# Altium PCB PCB2.PcbDoc (part 1 of 2)
Units mm, origin at the board's own origin, x right, y up, seen from the top; angles counter-clockwise.
Board outline 247 x 102 mm, 2 copper layers (Top Layer, Bottom Layer); 194 components, 192 nets, 825 pads, 179 vias.
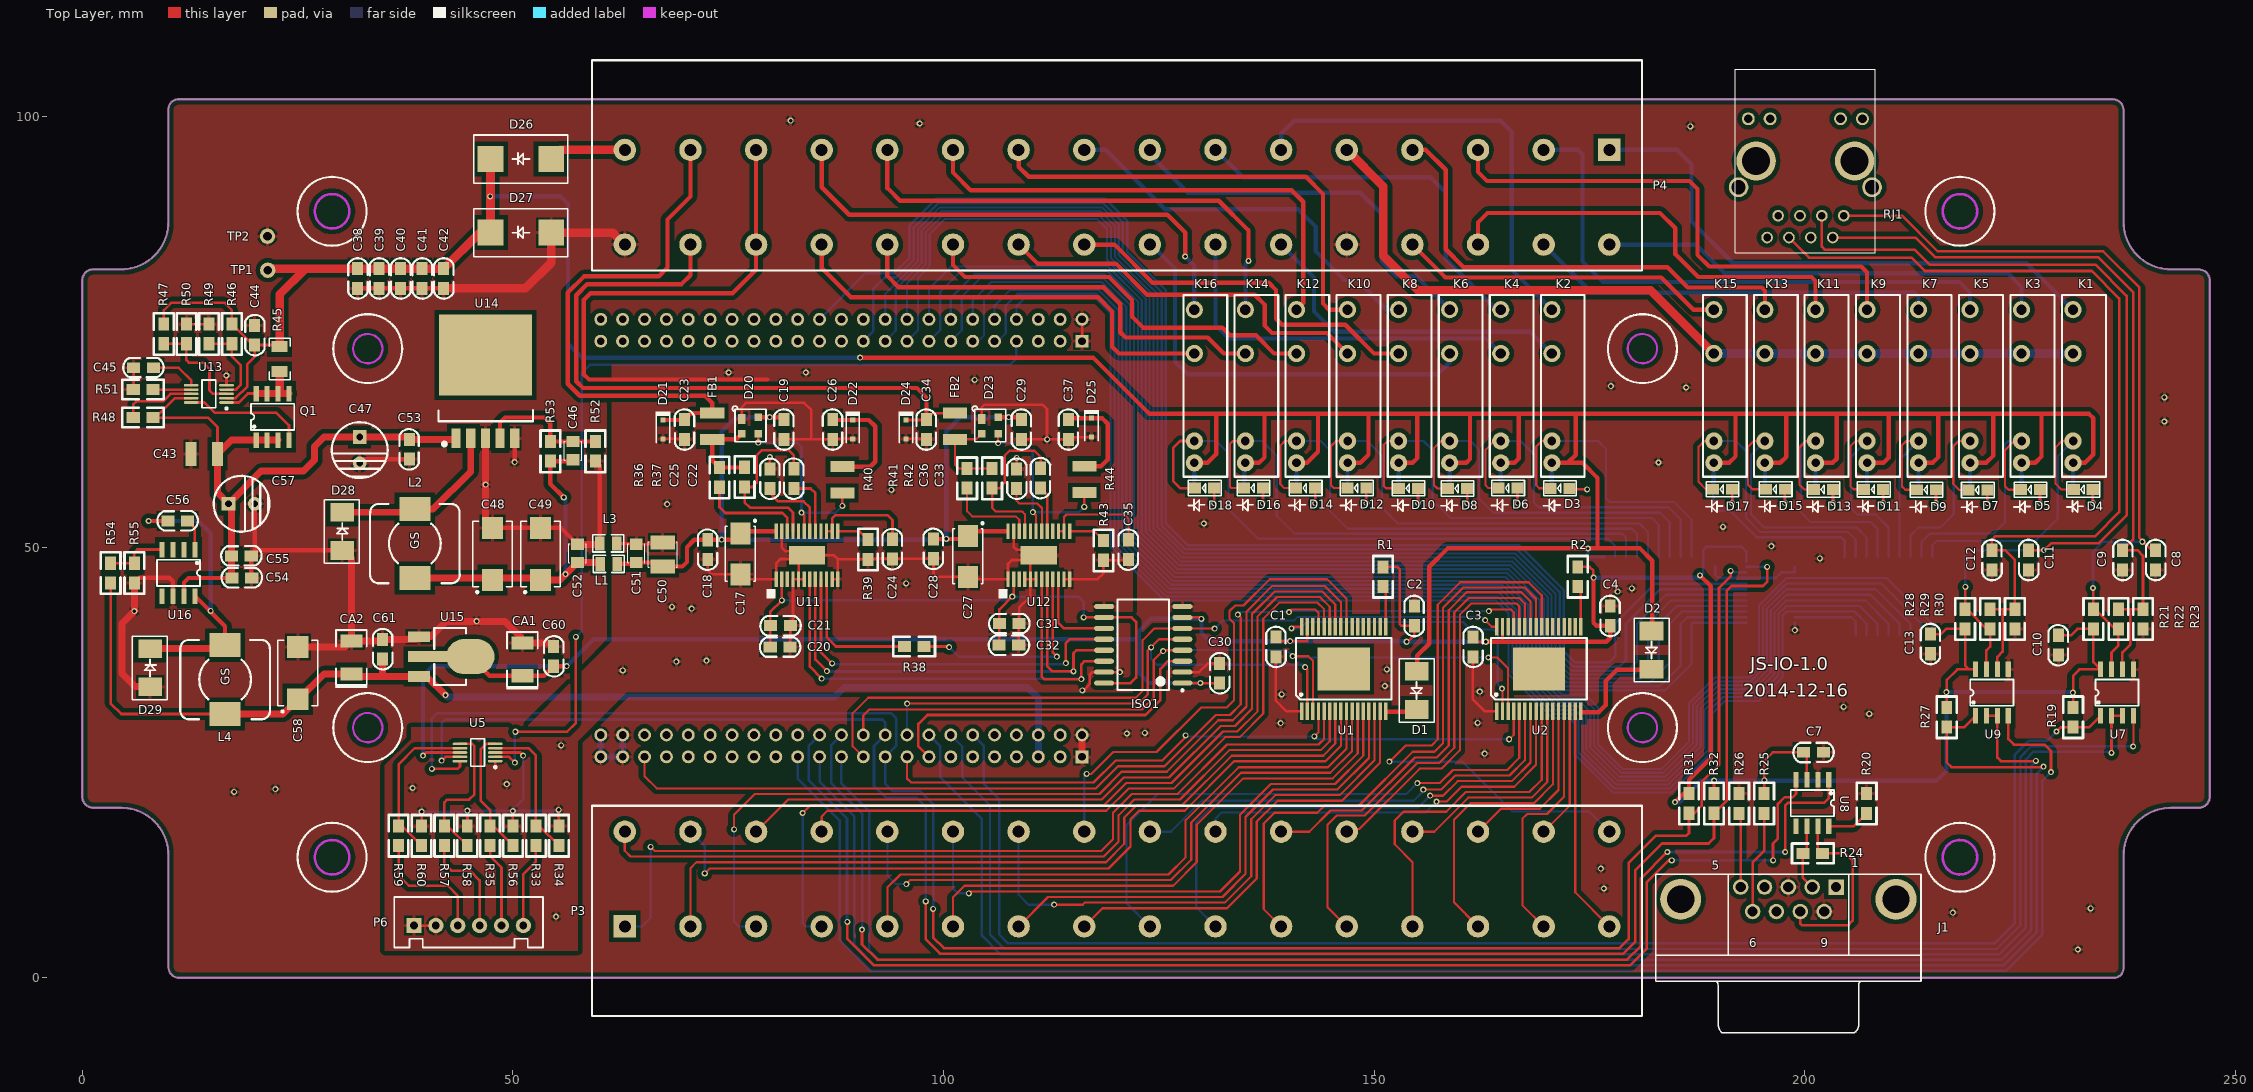
[diagram p0: Top Layer view]
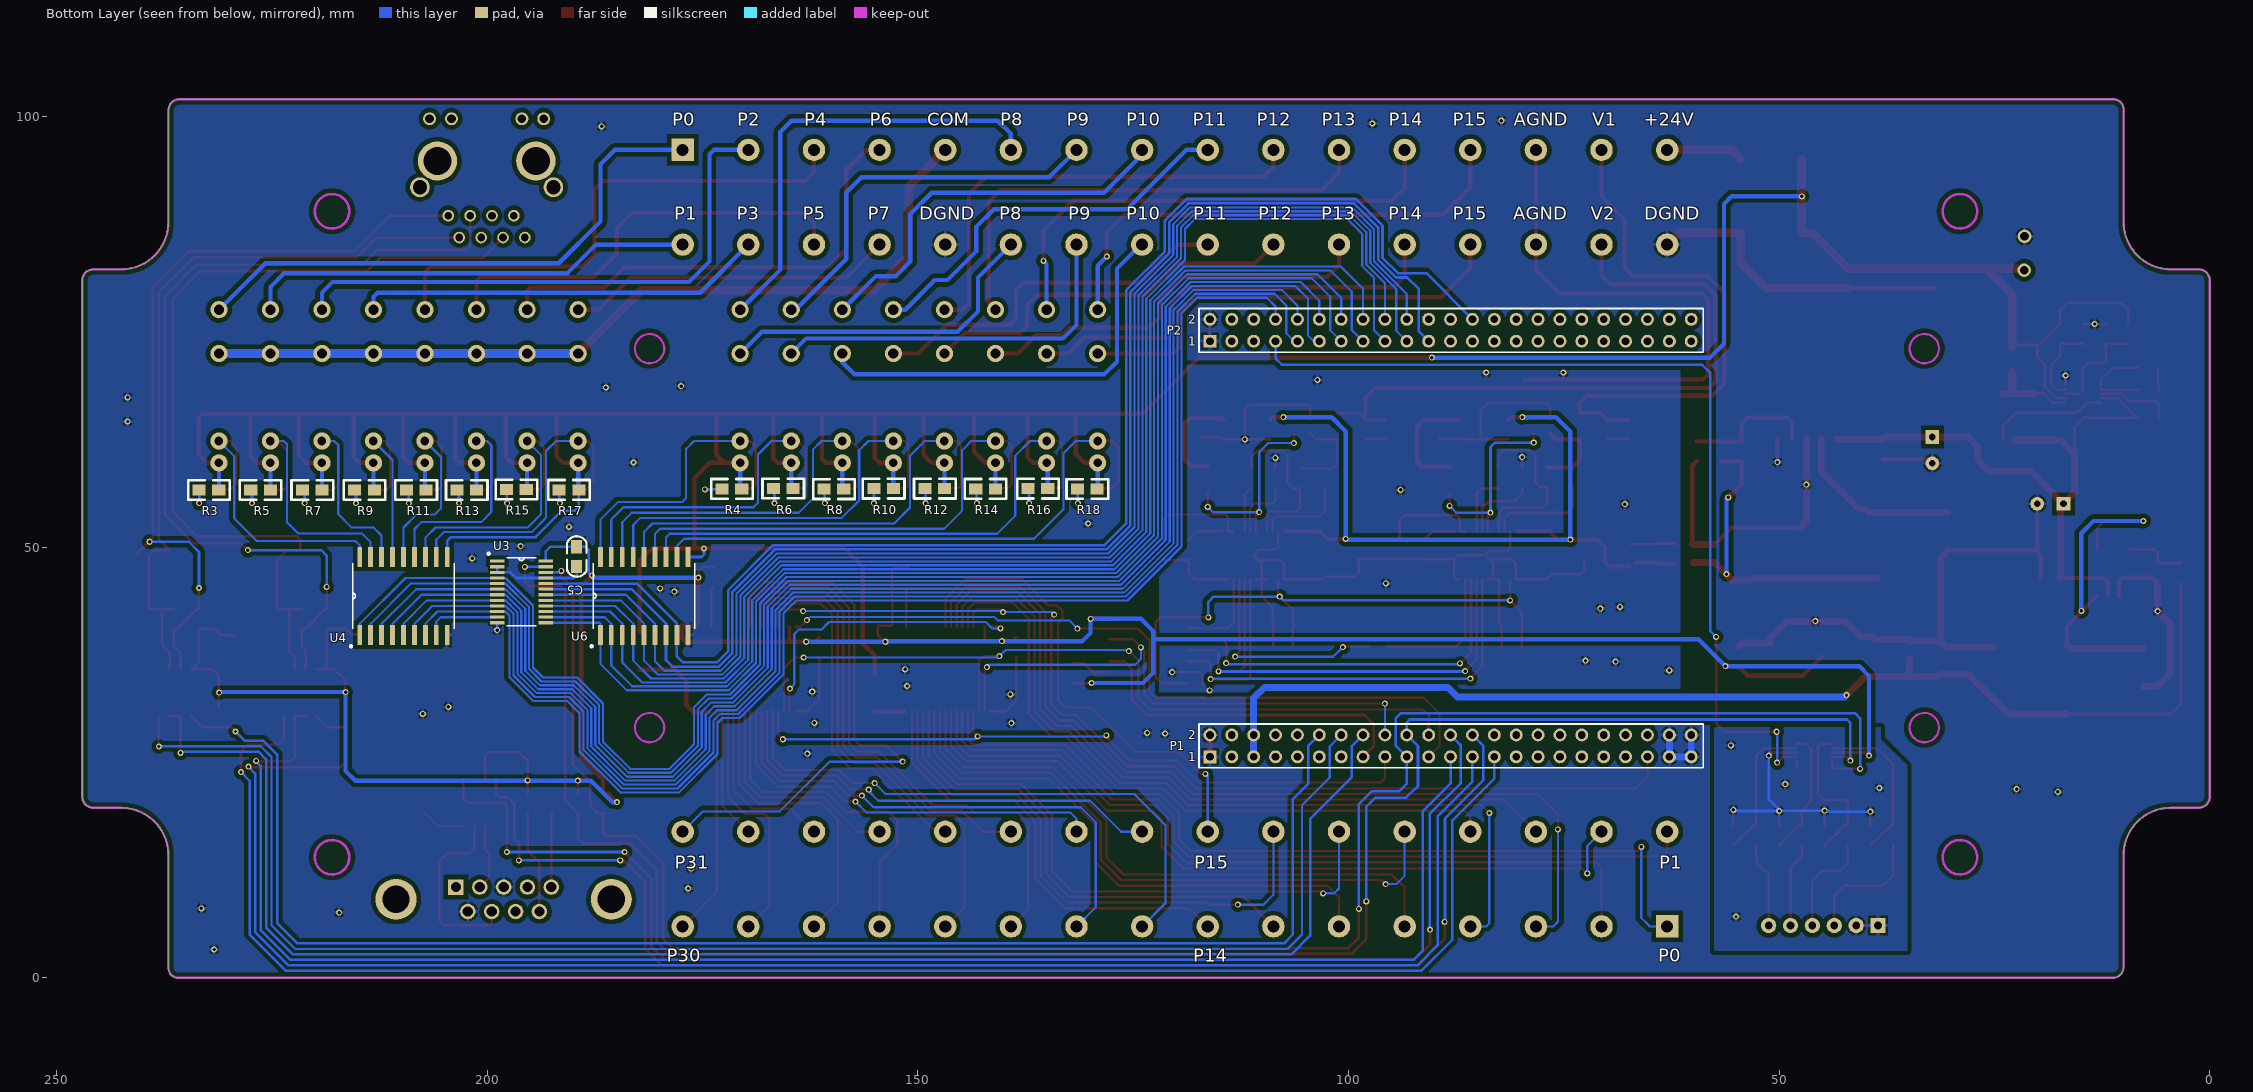
[diagram p1: Bottom Layer view, seen from below]

## Layer stack, top to bottom
Top Solder: solder mask 0.0102, Solder Resist, Dk 3.5
Top Layer: signal copper 0.0356
Dielectric1: dielectric 0.32, FR-4, Dk 4.8
Bottom Layer: signal copper 0.0356
Bottom Solder: solder mask 0.0102, Solder Resist, Dk 3.5

## Board outline
1.27,19.75 4.5,19.75 cw(c4.5,14.25) 10,14.25 10,1.27 ccw(c11.27,1.27) 11.27,0 235.857,0 ccw(c235.857,1.143) 237,1.143 237,14.243 cw(c242.5,14.243) 242.5,19.743 245.73,19.743 ccw(c245.73,21.013) 247,21.013 247,80.98 ccw(c245.73,80.98) 245.73,82.25 242.5,82.25 cw(c242.5,87.75) 237,87.75 237,100.73 ccw(c235.73,100.73) 235.73,102 11.143,102 ccw(c11.143,100.857) 10,100.857 10,87.757 cw(c4.5,87.757) 4.5,82.257 1.27,82.257 ccw(c1.27,80.987) 0,80.987 0,21.02 ccw(c1.27,21.02)

## Design rules (kind name [scope] priority, off if disabled: settings)
Clearance Clearance_1 [InPolygon] p1: gap=0.508
Clearance [All] p2: gap=0.2
ComponentClearance [All] p1: gap=0 collisioncheckmode=3 verticalgap=0 showdistances=FALSE
FabricationTestPointUsage TestPointUsage [All] p1: valid=0 allowmultiple=FALSE
FabricationTestpoint Testpoint [All] p1: side=3 testpointundercomponent=TRUE minsize=1.016 maxsize=2.54 preferedsize=1.524 minholesize=0 maxholesize=1.016 preferedholesize=0.813 testpointgrid=0.025 allowsidetop=TRUE allowsidebottom=TRUE usegrid=TRUE gridtolerance=0
Height [All] p1: minheight=0 maxheight=1873.374 prefheight=0
HoleSize [All] p1: absolutevalues=TRUE maxlimit=3.25 minlimit=0.025 maxpercent=80.000 minpercent=20.000
HoleToHoleClearance [All] p1: gap=0.2 allowstackedmicrovias=TRUE
MinimumSolderMaskSliver [All] p1: minsoldermaskwidth=0.2
PolygonConnect [All] p1: connectstyle=Relief reliefconductorwidth=0.4 reliefentries=4 polygonreliefangle="90 Angle" airgapwidth=0.254
RoutingVias [All] p1: holewidth=0.4 width=0.7 viastyle="Through Hole" minholewidth=0.15 minwidth=0.3 maxholewidth=0.711 maxwidth=1.27
SilkToSilkClearance [All] p1: silktosilkclearance=0.2
SilkToSolderMaskClearance [IsPad] p1: minsilkscreentomaskgap=0.2 clearancetoexposedcopper=TRUE
SolderMaskExpansion [All] p1: expansion=0.102
Width [All] p1: maxlimit=2 minlimit=0.254 preferedwidth=0.3 minimp=50.000000 maximp=50.000000 favimp=50.000000
20 further rules are at their usual default settings.

## Classes and differential pairs
net class PA[0..7]: PA0 PA1 PA2 PA3 PA4 PA5 PA6 PA7
net class PB[0..7]: PB0 PB1 PB2 PB3 PB4 PB5 PB6 PB7
component class Designator: C38 C39 C40 C41 C42 C43 C44 C45 C46 C47 C48 C49 C50 C51 C52 C53 C54 C55 C56 C57 C58 C60 C61 CA1 CA2 D26 D27 D28 D29 L1 L2 L3 L4 Q1 R45 R46 R47 R48 R49 R50 R51 R52 R53 R54 R55 TP1 TP2 U13 U14 U15 U16
component class Designator: P1 P2 P3 P4
component class Designator: C1 C2 C3 C4 D1 D2 R1 R2 U1 U2
component class Designator: C5 D3 D4 D5 D6 D7 D8 D9 D10 D11 D12 D13 D14 D15 D16 D17 D18 K1 K2 K3 K4 K5 K6 K7 K8 K9 K10 K11 K12 K13 K14 K15 K16 R3 R4 R5 R6 R7 R8 R9 R10 R11 R12 R13 R14 R15 R16 R17 R18 U3 U4 U6
component class Designator: C7 C8 C9 C10 C11 C12 C13 J1 P6 R19 R20 R21 R22 R23 R24 R25 R26 R27 R28 R29 R30 R31 R32 R33 R34 R35 R56 R57 R58 R59 R60 RJ1 U5 U7 U8 U9
component class Designator: C17 C18 C19 C20 C21 C22 C23 C24 C25 C26 C27 C28 C29 C30 C31 C32 C33 C34 C35 C36 C37 D20 D21 D22 D23 D24 D25 FB1 FB2 ISO1 R36 R37 R38 R39 R40 R41 R42 R43 R44 U11 U12

## Components (designator, comment, footprint, x,y, rotation, side; value= is the part's Value field where it differs from the comment)
C1 "Cap" 0805_cap 138.46,37.58 r90 top
C2 "0.1uF/10%/0805/50VDC" 0805_cap 154.76,42.85 r270 top
C3 "Cap" 0805_cap 161.34,37.58 r90 top
C4 "0.1uF/10%/0805/50VDC" 0805_cap 177.51,42.85 r270 top
C5 "Cap" 0805_cap 189.72,48.08 r90 bottom
C7 "" 0805_cap 200.163,26.3 r0 top
C8 "0.1uF/10%/0805/50VDC" 0805_cap 240.6,47.67 r90 top
C9 "0.1uF/10%/0805/50VDC" 0805_cap 236.78,47.67 r90 top
C10 "0.1uF/10%/0805/50VDC" 0805_cap 229.55,39.46 r270 top
C11 "0.1uF/10%/0805/50VDC" 0805_cap 225.85,47.67 r90 top
C12 "0.1uF/10%/0805/50VDC" 0805_cap 221.59,47.67 r90 top
C13 "0.1uF/10%/0805/50VDC" 0805_cap 214.7,39.6 r270 top
C17 "293D475X9035C2TE3" 6032-28 76.41,49.23 r270 top
C18 "GRM188R71H104KA93D" 0805_cap 72.73,50.55 r270 top
C19 "GRM188R71H104KA93D" 0805_cap 81.59,64.5 r270 top
C20 "GRM188R71H104KA93D" 0805_cap 80.18,38.53 r0 top
C21 "GRM188R71H104KA93D" 0805_cap 80.23,41.01 r0 top
C22 "GRM1885C1H222JA01D" 0805_cap 82.73,58.79 r270 top
C23 "06035C104KAT2A" 0805_cap 70.05,64.5 r270 top
C24 "06035C104KAT2A" 0805_cap 94.18,50.61 r270 top
C25 "C1608X7R1H223K" 0805_cap 79.71,57.11 r90 top
C26 "06035C104KAT2A" 0805_cap 87.24,64.5 r270 top
C27 "293D475X9035C2TE3" 6032-28 102.82,48.93 r270 top
C28 "GRM188R71H104KA93D" 0805_cap 98.94,50.64 r270 top
C29 "GRM188R71H104KA93D" 0805_cap 109.17,64.5 r270 top
C30 "GRM188R71H104KA93D" 0805_cap 131.93,34.53 r90 top
C31 "GRM188R71H104KA93D" 0805_cap 106.79,41.26 r0 top
C32 "GRM188R71H104KA93D" 0805_cap 106.75,38.74 r0 top
C33 "GRM1885C1H222JA01D" 0805_cap 111.38,58.86 r270 top
C34 "06035C104KAT2A" 0805_cap 98.12,64.5 r270 top
C35 "06035C104KAT2A" 0805_cap 121.57,50.55 r270 top
C36 "C1608X7R1H223K" 0805_cap 108.37,57.11 r90 top
C37 "06035C104KAT2A" 0805_cap 114.63,64.5 r270 top
C38 "Cap" 0805_cap 31.86,80.36 r90 top
C39 "Cap" 0805_cap 34.355,80.36 r90 top
C40 "Cap" 0805_cap 36.85,80.36 r90 top
C41 "Cap" 0805_cap 39.345,80.36 r90 top
C42 "Cap" 0805_cap 41.84,80.36 r90 top
C43 "GRM32ER72A225KA35L" 1210 14.17,60.83 r0 top
C44 "06031C102JAT2A" 0805_cap 19.9,73.78 r90 top
C45 "UMK107ABJ474KA-T" 0805_cap 7.94,70.72 r180 top
C46 "0.1uF/50V" C-0805 56.07,62.91 r270 top
C47 "220μF" CZ3.0/6.5 32.21,61.266 r90 top
C48 "476C" 7343-43 47.63,49.22 r90 top
C49 "476C" 7343-43 53.19,49.22 r90 top
C50 "10uF/10%/1210/16VDC" C-1210 65.69,51.35 r270 top
C51 "0.1uF/10%/0805/50VDC" C-0805 63.42,50.98 r270 top
C52 "0.1UF" C-0805 56.59,50.98 r270 top
C53 "0.1uF" 0805_CAP 38.08,62.196 r270 top
C54 "4.7μF/10%/0805" 0805_CAP 19.36,46.32 r180 top
C55 "4.7μF/10%/0805" 0805_CAP 19.31,48.86 r180 top
C56 "0.01μF/10%/0805" 0805_CAP 11.91,52.93 r180 top
C57 "220μF" CZ3.0/6.5 18.5,55.04 r180 top
C58 "476C" 7343-43 25.02,35.37 r90 top
C60 "0.1uF" 0805_CAP 54.61,36.49 r90 top
C61 "0.1uF" 0805_CAP 34.74,37.32 r90 top
CA1 "4.7UF/16V" 3528cap 51.12,35.1 r90 top
CA2 "10UF/16V" 3528cap 31.27,35.32 r90 top
D1 "SMB" SMB 154.92,33.37 r270 top
D2 "SMB" SMB 182.19,38.06 r270 top
D3 "LED3" 0805LED 171.53,56.85 r180 top
D4 "LED3" 0805LED 232.28,56.71 r180 top
D5 "LED3" 0805LED 226.15,56.69 r180 top
D6 "LED3" 0805LED 165.5,56.87 r180 top
D7 "LED3" 0805LED 220.05,56.66 r180 top
D8 "LED3" 0805LED 159.63,56.83 r180 top
D9 "LED3" 0805LED 214.08,56.68 r180 top
D10 "LED3" 0805LED 153.94,56.85 r180 top
D11 "LED3" 0805LED 207.95,56.73 r180 top
D12 "LED3" 0805LED 147.94,56.87 r180 top
D13 "LED3" 0805LED 202.12,56.71 r180 top
D14 "LED3" 0805LED 141.99,56.87 r180 top
D15 "LED3" 0805LED 196.56,56.74 r180 top
D16 "LED3" 0805LED 135.94,56.89 r180 top
D17 "LED3" 0805LED 190.4,56.74 r180 top
D18 "LED3" 0805LED 130.28,56.87 r180 top
D20 "" SOT-143 76.58,65.08 r0 top
D21 "CDSOD323-T15SC" sod-323 67.43,63.67 r270 top
D22 "CDSOD323-T15SC" sod-323 89.45,63.67 r270 top
D23 "" SOT-143 104.43,65.08 r0 top
D24 "" sod-323 95.65,63.67 r270 top
D25 "" sod-323 117.18,63.886 r270 top
D26 "B540C-13-F" SMB1 50.92,95.06 r180 top
D27 "SMCJ26CA" SMB1 50.92,86.52 r180 top
D28 "D Schottky" SMB 30.18,51.83 r90 top
D29 "SMB" SMB 7.87,35.99 r90 top
FB1 "MH3261-501Y" 1210 73.14,64.05 r270 top
FB2 "MH3261-501Y" 1210 101.32,64.05 r270 top
ISO1 "ISO7641FCDW" M16B_N 123.18,38.67 r180 top
J1 "" CONN_1734348-1 198.08,-0.38 r180 top locked
K1 "Relay-SPST" PA1a-24v 229.864,58.182 r90 top
K2 "Relay-SPST" PA1a-24v 169.349,58.182 r90 top
K3 "Relay-SPST" PA1a-24v 223.885,58.182 r90 top
K4 "Relay-SPST" PA1a-24v 163.42,58.182 r90 top
K5 "Relay-SPST" PA1a-24v 217.906,58.182 r90 top
K6 "Relay-SPST" PA1a-24v 157.49,58.182 r90 top
K7 "Relay-SPST" PA1a-24v 211.927,58.182 r90 top
K8 "Relay-SPST" PA1a-24v 151.561,58.182 r90 top
K9 "Relay-SPST" PA1a-24v 205.949,58.182 r90 top
K10 "Relay-SPST" PA1a-24v 145.631,58.182 r90 top
K11 "Relay-SPST" PA1a-24v 199.97,58.182 r90 top
K12 "Relay-SPST" PA1a-24v 139.702,58.182 r90 top
K13 "Relay-SPST" PA1a-24v 194.088,58.182 r90 top
K14 "Relay-SPST" PA1a-24v 133.772,58.182 r90 top
K15 "Relay-SPST" PA1a-24v 188.159,58.182 r90 top
K16 "Relay-SPST" PA1a-24v 127.843,58.182 r90 top
L1 "0R/5%/0805/1/8W" R-0805 59.61,47.16 r0 top
L2 "GSRH129-470M" GSDS104C2 38.61,50.42 r0 top
L3 "0R/5%/0805/1/8W" R-0805 59.57,49.53 r0 top
L4 "15μH" GSDS104C2 16.58,34.63 r0 top
P1 "Header 23X2" HDR2X23 116.078,25.658 r180 bottom locked
P2 "Header 23X2" HDR2X23 116.078,73.914 r180 bottom locked
P3 "Header 16X2" CON16X2-8.5 62.99,5.97 r90 top locked
P4 "Header 16X2" CON16X2-8.5 177.29,96.13 r270 top locked
P6 "ISP" SIP-6B 38.51,6.07 r0 top
Q1 "FDS8870" SO-G8 22.11,65.14 r0 top
R1 "10K/1%/0805/1/8W" 0805 151.02,47.71 r270 top
R2 "10K/1%/0805/1/8W" 0805 173.63,47.71 r270 top
R3 "Res3" 0805 231.16,56.64 r0 bottom
R4 "Res3" 0805 170.44,56.77 r0 bottom
R5 "Res3" 0805 225.15,56.64 r0 bottom
R6 "Res3" 0805 164.47,56.81 r0 bottom
R7 "Res3" 0805 219.15,56.64 r0 bottom
R8 "Res3" 0805 160.88,56.74 r180 bottom
R9 "Res3" 0805 213.09,56.64 r0 bottom
R10 "Res3" 0805 155.1,56.79 r180 bottom
R11 "Res3" 0805 207.09,56.64 r0 bottom
R12 "Res3" 0805 149.16,56.79 r180 bottom
R13 "Res3" 0805 201.22,56.64 r0 bottom
R14 "Res3" 0805 143.27,56.78 r180 bottom
R15 "Res3" 0805 195.45,56.7 r0 bottom
R16 "Res3" 0805 137.19,56.79 r180 bottom
R17 "Res3" 0805 189.35,56.65 r0 bottom
R18 "Res3" 0805 131.46,56.76 r180 bottom
R19 "10K/1%/0805/1/8W" 0805 231.14,29.11 r90 top
R20 "CRCW080560R4FKEA" 0805 207.17,19.1 r90 top
R21 "47K/5%/0805/1/8W" 0805 233.49,42.8 r270 top
R22 "12K/1%/0805/1/8W" 0805 236.4,42.8 r270 top
R23 "47K/5%/0805/1/8W" 0805 239.25,42.8 r270 top
R24 "CRCW080560R4FKEA" 0805 202.06,14.45 r180 top
R25 "CRCW080560R4FKEA" 0805 195.27,19.1 r90 top
R26 "CRCW080560R4FKEA" 0805 192.37,21.386 r270 top
R27 "10K/1%/0805/1/8W" 0805 216.47,29.11 r90 top
R28 "47K/5%/0805/1/8W" 0805 218.6,42.8 r270 top
R29 "12K/1%/0805/1/8W" 0805 221.5,42.8 r270 top
R30 "47K/5%/0805/1/8W" 0805 224.38,42.8 r270 top
R31 "CRCW080560R4FKEA" 0805 186.54,21.39 r270 top
R32 "CRCW080560R4FKEA" 0805 189.45,21.39 r270 top
R33 "CRCW080560R4FKEA" 0805 52.671,15.354 r90 top
R34 "CRCW080560R4FKEA" 0805 55.33,15.354 r90 top
R35 "CRCW080560R4FKEA" 0805 47.354,15.354 r90 top
R36 "CRCW060315R0JNEA" 0805 73.98,56.964 r90 top
R37 "CRCW060315R0JNEA" 0805 76.91,56.99 r90 top
R38 "Res3" 0805 97.73,38.47 r180 top
R39 "RT0603BRD0715KL" 0805 91.22,48.59 r90 top
R40 "RPC2512JT15R0" 1210 88.25,57.82 r270 top
R41 "CRCW060315R0JNEA" 0805 102.73,56.86 r90 top
R42 "CRCW060315R0JNEA" 0805 105.64,56.85 r90 top
R43 "RT0603BRD0715KL" 0805 118.56,48.481 r90 top
R44 "RPC2512JT15R0" 1210 116.34,57.87 r270 top
R45 "PRL1632-R020-F-T1" 1206 22.91,71.84 r270 top
R46 "CRCW060395K3FKEA" 0805 17.37,73.62 r90 top
R47 "CRCW060347K5FKEA" 0805 9.46,73.62 r90 top
R48 "CRCW060310K0FKEA" 0805 8.2,65.05 r180 top
R49 "CRCW06037K50FKEA" 0805 14.69,75.906 r270 top
R50 "CRCW060315K8FKEA" 0805 12.09,75.906 r270 top
R51 "RG1608P-563-B-T5" 0805 5.91,68.3 r0 top
R52 "1K/1%/0805" 0805 59.57,62.276 r270 top
R53 "4.7K/1%/0805" 0805 54.34,59.99 r90 top
R54 "10K" 0805 3.29,48.13 r270 top
R55 "3.24K/1%/0805" 0805 6.04,48.13 r270 top
R56 "CRCW080560R4FKEA" 0805 50.013,15.354 r90 top
R57 "CRCW080560R4FKEA" 0805 42.037,15.354 r90 top
R58 "CRCW080560R4FKEA" 0805 44.696,15.354 r90 top
R59 "CRCW080560R4FKEA" 0805 36.72,15.354 r90 top
R60 "CRCW080560R4FKEA" 0805 39.379,15.354 r90 top
RJ1 "HR911105A-RJ45" HR911105A 200.05,94.84 r0 top
TP1 "TP-040_RND" TP-040_RND 21.54,82.16 r0 top
TP2 "TP-040_RND" TP-040_RND 21.5,86.09 r0 top
U1 "MC33975" SOIC-32 151.33,30.96 r90 top
U2 "MC33975" SOIC-32 173.99,30.96 r90 top
U3 "PCA9555" PW24 196.01,44.8 r180 bottom
U4 "ULN2803A_DW_18" DW18 209.71,44.34 r90 bottom
U5 "ADS1015" MUB10A_N 45.9,26.16 r180 top
U6 "ULN2803A_DW_18" DW18 181.77,44.34 r90 bottom
U7 "MAX3485/SO-8" SO-G8 236.24,33.11 r0 top
U8 "SN65HVD230" SO-G8 200.86,20.29 r180 top
U9 "MAX3485/SO-8" SO-G8 221.72,33.11 r0 top
U11 "DAC8760IPWP" PWP24-DIE84X166 84.13,49.06 r90 top
U12 "DAC8760IPWP" PWP24-DIE84X166 111.05,49.06 r90 top
U13 "LM5069MM-2/NOPB" MUB10A_N 14.69,67.8 r180 top
U14 "LM2596S-ADJ" TO-263(S)-5 46.83,71.25 r0 top
U15 "AS1117-3.3V" SOT-223 45.03,37.3 r270 top
U16 "TPS5430" SO-G8 11.16,47.03 r180 top

## Footprints (in the part's own frame and the unit in brackets; to place one, negate y for a bottom-side part, rotate by r counter-clockwise, add the part's x,y. Pads: shape width x height; smd on the part's side, far side on the other; paste and mask are expansions set on the pad)
0805 [mil]
  rect 60x50 smd: 1(0,0) 2(90,0)
  silkscreen extent -50,-45 140,45
0805_cap [mm]
  rect 1.524x1.27 smd: 1(-0.31,-0.11) 2(1.976,-0.11)
  silkscreen extent -1.51,-1.26 3.19,0.99
0805_CAP [mm]
  rect 1.524x1.27 smd: 1(-0.31,-0.11) 2(1.976,-0.11)
  silkscreen extent -1.51,-1.26 3.19,0.99
0805LED [mm]
  rect 1.4x1.27 smd: 1(-1.143,0.013) 2(1.067,0.013)
  silkscreen extent -1.94,-0.88 1.88,2.67
1206 [mm] "1206 from SM-752 data"
  rect 1.3x1.85 smd: 1(-1.45,0) 2(1.45,0)
  silkscreen extent -2.4,-1.21 2.4,1.21, body extent -1.7,-0.9 1.7,0.9, height 1.35
1210 [mil]
  rect 50x110 smd mask+2: 1(60,0) 2(-60,0)
3528cap [mil]
  rect 60x100 smd: 1(-1,1) 2(149,1)
  silkscreen extent -61,-69 199,71
6032-28 [mm] "Medium Density IPC based on Vishay Sprague 293D datasheet."
  rect 2.55x2.3 smd: 1(-2.375,0) 2(2.375,0)
  silkscreen extent -3.96,-1.75 3.2,1.83, body extent -3.15,-1.75 3.15,1.75, height 2.8
7343-43 [mm] "Medium density IPC based on Kemet T495 series"
  rect 2.55x2.45 smd: 1(-3.025,0) 2(3.025,0)
  silkscreen extent -4.56,-2.3 3.8,2.3, body extent -3.8,-2.3 3.8,2.3, height 4.3
C-0805 [mm]
  rect 1.3x1.5 smd: 1(0.65,0.9) 2(2.75,0.9)
  silkscreen extent 0.6,-0.1 2.8,1.9
C-1210 [mm]
  rect 1.6x2.8 smd: 1(0.8,1.7) 2(3.6,1.7)
  silkscreen extent 0.7,0.03 3.7,3.37
CON16X2-8.5 [mm]
  rect 2.6x2.6 hole 1.4: 1(0,0)
  round 2.6 hole 1.4: 2(11,0) 3(0,-7.62) 4(11,-7.62) 5(0,-15.24) 6(11,-15.24) 7(0,-22.86) 8(11,-22.86) 9(0,-30.48) 10(11,-30.48) 11(0,-38.1) 12(11,-38.1) 13(0,-45.72) 14(11,-45.72) 15(0,-53.34) 16(11,-53.34) 17(0,-60.96) 18(11,-60.96) 19(0,-68.58) 20(11,-68.58) 21(0,-76.2) 22(11,-76.2) 23(0,-83.82) 24(11,-83.82) 25(0,-91.44) 26(11,-91.44) 27(0,-99.06) 28(11,-99.06) 29(0,-106.68) 30(11,-106.68) 31(0,-114.3) 32(11,-114.3)
  silkscreen extent -10.4,-118.11 14,3.81
CONN_1734348-1 [mm] "Connector; D Subminiature 9 Position; Right Angle"
  rect 1.8x1.8 hole 1.2: 1(-5.54,-10.92)
  round 1.8 hole 1.2: 2(-2.77,-10.92) 3(0,-10.92) 4(2.77,-10.92) 5(5.54,-10.92) 6(-4.155,-8.08) 7(-1.385,-8.08) 8(1.385,-8.08) 9(4.155,-8.08)
  round 4.76 hole 3.18: 10(-12.495,-9.5) 11(12.495,-9.5)
  silkscreen extent -15.4,-12.4 15.4,6, body extent -15.4,-12.4 15.4,6.02, height 12.52
CZ3.0/6.5 [mm]
  rect 1.6x1.6 hole 0.8: 1(1.524,0)
  round 1.6 hole 0.8: 2(-1.524,0)
  silkscreen extent -3.25,-3.25 3.25,3.25
DW18 [mil]
  rect 91x22 smd: 1(-178,200) 2(-178,150) 3(-178,100) 4(-178,50) 5(-178,0) 6(-178,-50) 7(-178,-100) 8(-178,-150) 9(-178,-200) 10(178,-200) 11(178,-150) 12(178,-100) 13(178,-50) 14(178,0) 15(178,50) 16(178,100) 17(178,150) 18(178,200)
  silkscreen extent -235,-232 150,245
GSDS104C2 [mm]
  rect 3.6x2.8 smd: 1(0,4) 2(0,-4)
  silkscreen extent -5.2,-4.6 5.21,4.6
HDR2X23 [mm] "Connector; Header; 23x2 Position"
  rect 1.5x1.5 hole 0.9: 1(0,0)
  round 1.5 hole 0.9: 2(0,2.54) 3(2.54,0) 4(2.54,2.54) 5(5.08,0) 6(5.08,2.54) 7(7.62,0) 8(7.62,2.54) 9(10.16,0) 10(10.16,2.54) 11(12.7,0) 12(12.7,2.54) 13(15.24,0) 14(15.24,2.54) 15(17.78,0) 16(17.78,2.54) 17(20.32,0) 18(20.32,2.54) 19(22.86,0) 20(22.86,2.54) 21(25.4,0) 22(25.4,2.54) 23(27.94,0) 24(27.94,2.54) 25(30.48,0) 26(30.48,2.54) 27(33.02,0) 28(33.02,2.54) 29(35.56,0) 30(35.56,2.54) 31(38.1,0) 32(38.1,2.54) 33(40.64,0) 34(40.64,2.54) 35(43.18,0) 36(43.18,2.54) 37(45.72,0) 38(45.72,2.54) 39(48.26,0) 40(48.26,2.54) 41(50.8,0) 42(50.8,2.54) 43(53.34,0) 44(53.34,2.54) 45(55.88,0) 46(55.88,2.54)
  silkscreen extent -1.27,-1.27 57.28,3.81
HR911105A [mm]
  round 1.35 hole 0.89: 1(4.46,-6.35) 2(3.18,-8.89) 3(1.92,-6.35) 4(0.64,-8.89) 5(-0.62,-6.35) 6(-1.9,-8.89) 7(-3.16,-6.35) 8(-4.44,-8.89)
  round 1.5 hole 1.02: 9(6.625,4.9) 10(4.085,4.9) 11(-4.085,4.9) 12(-6.625,4.9)
  round 2.286 hole 1.63: ""(-7.745,-3.05) ""(7.745,-3.05)
  round 4.572 hole 3.25: ""(-5.715,0) ""(5.715,0)
  silkscreen extent -8.13,-10.67 8.13,10.67
M16B_N [mm] "SOIC, 16-Leads, Body 10.3x7.5mm, Pitch 1.27mm, IPC Medium Density"
  oval 2.3x0.6 smd: 1(-4.55,4.445) 2(-4.55,3.175) 3(-4.55,1.905) 4(-4.55,0.635) 5(-4.55,-0.635) 6(-4.55,-1.905) 7(-4.55,-3.175) 8(-4.55,-4.445) 9(4.55,-4.445) 10(4.55,-3.175) 11(4.55,-1.905) 12(4.55,-0.635) 13(4.55,0.635) 14(4.55,1.905) 15(4.55,3.175) 16(4.55,4.445)
  silkscreen extent -4.67,-5.25 3,5.42, body extent -3.75,-5.25 3.75,5.25, height 2.65
MUB10A_N [mm] "TSSOP, 10-Leads, Body 3x3mm, Pitch 0.5mm, IPC Medium Density"
  oval 1.7x0.3 smd: 1(-2.05,1) 2(-2.05,0.5) 3(-2.05,0) 4(-2.05,-0.5) 5(-2.05,-1) 6(2.05,-1) 7(2.05,-0.5) 8(2.05,0) 9(2.05,0.5) 10(2.05,1)
  silkscreen extent -2.17,-1.6 0.8,1.82, body extent -1.6,-1.6 1.6,1.6, height 1.09
PA1a-24v [mm]
  round 2 hole 1.2: 1(19.39,-1.27) 2(14.31,-1.27)
  round 2 hole 1: 3(4.15,-1.27) 4(1.61,-1.27)
  silkscreen extent 0,-5.08 21.08,0
PW24 [mil]
  rect 66x14 smd: 1(-111,140.75) 2(-111,115.16) 3(-111,89.57) 4(-111,63.98) 5(-111,38.39) 6(-111,12.8) 7(-111,-12.8) 8(-111,-38.39) 9(-111,-63.98) 10(-111,-89.57) 11(-111,-115.16) 12(-111,-140.75) 13(111,-140.75) 14(111,-115.16) 15(111,-89.57) 16(111,-63.98) 17(111,-38.39) 18(111,-12.8) 19(111,12.8) 20(111,38.39) 21(111,63.98) 22(111,89.57) 23(111,115.16) 24(111,140.75)
  silkscreen extent -155,-156 67,180
PWP24-DIE84X166 [mil]
  rect 70x15 smd: 1(-109.3,140.5) 2(-109.3,114.9) 3(-109.3,89.3) 4(-109.3,63.7) 5(-109.3,38.1) 6(-109.3,12.5) 7(-109.3,-13.1) 8(-109.3,-38.7) 9(-109.3,-64.3) 10(-109.3,-89.9) 11(-109.3,-115.5) 12(-109.3,-141.1) 13(109.7,-141.2) 14(109.7,-115.6) 15(109.7,-90) 16(109.7,-64.4) 17(109.7,-38.8) 18(109.7,-13.2) 19(109.7,12.4) 20(109.7,38) 21(109.7,63.6) 22(109.7,89.2) 23(109.7,114.8) 24(109.7,140.5)
  rect 84x166 smd: 25(0,-0.1)
  silkscreen extent -196,144 -156,184
R-0805 [mm]
  rect 1.1x1.6 smd: 1(0.5,0.9) 2(2.5,0.9)
  silkscreen extent -0.3,-0.1 3.3,1.9
SIP-6B [mil]
  rect 70x70 hole 35: 1(0,0)
  round 70 hole 35: 2(100,0) 3(200,0) 4(300,0) 5(400,0) 6(500,0)
  silkscreen extent -90,-100 590,130
SMB [mm] "Molded Diode, 2-Leads, Body 5.4x3.6mm, IPC Medium Density, based on OnSemi component dimensions"
  rect 2.159x2.743 smd: 1(-2.21,0) 2(2.21,0)
  silkscreen extent -3.68,-1.99 3.68,2.07, body extent -2.7,-1.8 2.7,1.8, height 2.32
SMB1 [mm] "Medium density IPC based on Kemet T495 series"
  rect 3x3 smd: 1(-3.525,0) 2(3.525,0)
  silkscreen extent -5.46,-2.79 5.46,2.79, body extent -3.8,-2.3 3.8,2.3, height 4.3
SO-G8 [mm]
  rect 0.6x1.8 smd: 1(-1.916,-2.7) 2(-0.646,-2.7) 3(0.624,-2.7) 4(1.894,-2.7) 5(1.894,2.7) 6(0.624,2.7) 7(-0.646,2.7) 8(-1.916,2.7)
  silkscreen extent -2.51,-1.52 2.49,1.52
sod-323 [mm] "NXP recommended land pattern"
  rect 0.6x0.6 smd paste-0.05: 1(-1.1,0) 2(1.1,0)
  silkscreen extent -2.06,-0.86 1.53,0.86, body extent -1.3,-0.67 1.3,0.68, height 1.1
SOIC-32 [mm]
  rect 5x6.05 smd mask+0.08: 0(4.9,4.875)
  rect 2.05x0.4 smd mask+0.08: 1(0,9.75) 2(0,9.1) 3(0,8.45) 4(0,7.8) 5(0,7.15) 6(0,6.5) 7(0,5.85) 8(0,5.2) 9(0,4.55) 10(0,3.9) 11(0,3.25) 12(0,2.6) 13(0,1.95) 14(0,1.3) 15(0,0.65) 16(0,0) 17(9.8,0) 18(9.8,0.65) 19(9.8,1.3) 20(9.8,1.95) 21(9.8,2.6) 22(9.8,3.25) 23(9.8,3.9) 24(9.8,4.55) 25(9.8,5.2) 26(9.8,5.85) 27(9.8,6.5) 28(9.8,7.15) 29(9.8,7.8) 30(9.8,8.45) 31(9.8,9.1) 32(9.8,9.75)
  silkscreen extent 1.35,-0.67 8.48,10.43
SOT-143 [mm]
  rect 0.85x1.2 smd: 1(0,-0.2)
  rect 0.85x0.85 smd: 2(0,-1.9) 3(1.9,-1.9) 4(1.9,0)
  silkscreen extent -1.1,-2.85 2.8,1.3, body extent -0.26,-2.41 2.16,0.51, height 1
SOT-223 [mil]
  rect 50x100 smd: 1(-90.5,-234) 3(90.5,-234)
  oval 160x220 smd: 2(0,1)
  rect 50x200 smd: 2(0,-184)
  silkscreen extent -130,-164 130,-19
TO-263(S)-5 [mm]
  rect 10.8x9.4 smd: 0(-0.025,1.075)
  rect 1.07x2.3 smd: 1(-3.425,-8.611) 2(-1.725,-8.611) 3(-0.025,-8.611) 4(1.675,-8.611) 5(3.375,-8.611)
  silkscreen extent -5.49,-9.47 5.51,-5.36
TP-040_RND [mil]
  round 70 / inner round 62 / far side round 62 hole 40: 1(0,0)

## Part data
C1 C3 C5 C38 C39 C40 C41 C42: "Capacitor"
C2 C4 C8 C9 C10 C11 C12 C13 C50 C51: library part ASC-0024CA
C7: library part C1005X7R1C103K, "CAP, CERM, 0.01uF, 16V, +/-10%, X7R, 0402"
C17 C27: "CAP, TA, 4.7uF, 35V, +/-10%, 1.9 ohm, SMD"
C18 C19 C20 C21 C23 C24 C26 C28 C29 C30 C31 C32 C34 C35 C37: "CAP, CERM, 0.1uF, 50V, +/-10%, X7R, 0603"
C22 C33: "CAP, CERM, 2200pF, 50V, +/-5%, C0G/NP0, 0603"
C25 C36: "CAP, CERM, 0.022uF, 50V, +/-10%, X7R, 0603"
C43: "CAP, CERM, 2.2uF, 100V, +/-10%, X7R, 1210"
C44: "CAP, CERM, 1000pF, 100V, +/-5%, X7R, 0603"
C45: "CAP, CERM, 0.47uF, 50V, 10%, X5R, 0603"
C46 C52 C54 C55 C56: library part Cap, "Capacitor"
C47 C48 C49 C57 C58: library part "Cap Pol1", "Polarized Capacitor (Radial)"
C53 C60 C61: library part C
CA1 CA2: library part ECAP
D1 D2 D29: library part "Diode 1N5408", "3 Amp Medium Power Silicon Rectifier Diode"
D3 D4 D5 D6 D7 D8 D9 D10 D11 D12 D13 D14 D15 D16 D17 D18: "Typical BLUE SiC LED"
D20 D23: library part CD143A-SR70, "IC TVS ARRAY 2-LINE 70V SOT-143"
D21 D22 D24 D25: library part SMAJ15CA, "DIODE TVS ARRAY 15V SOD323"
D26 D27: library part "D Schottky", "Schottky Diode"
FB1 FB2: library part Ferrite_Bead, "BEAD FERRITE 500 OHM 3.0A 3216"
ISO1: library part ISO7241, "ISOLATOR DGTL 25MBPS 4CH 16SOIC"
J1: library part 1734348-1, "Conn D-SUB RCPT R/A 9POS GOLD/FL, TH"
K1 K2 K3 K4 K5 K6 K7 K8 K9 K10 K11 K12 K13 K14 K15 K16: "Single-Pole Single-Throw Relay"
L1 L3: library part ASR-0010AA
L2 L4: library part Inductor, "Inductor"
P1 P2: "Header, 23-Pin, Dual row"
P3 P4: "Header, 16-Pin, Dual row"
P6: library part "Header 6", "Header, 6-Pin"
Q1: library part MOSFET_N_8
R1 R2 R19 R27: library part ASR-0030AA
R3 R4 R5 R6 R7 R8 R9 R10 R11 R12 R13 R14 R15 R16 R17 R18 R38: "Resistor"
R20 R25 R26: "RES, 0 ohm, 1%, 0.125W, 0805"
R21 R23 R28 R30: library part ASR-0134BA
R22 R29: library part ASR-0028BA
R24 R31 R32 R33 R34 R35 R56 R57 R58 R59 R60: "RES, 120ohm, 1%, 0.125W, 0805"
R36 R37 R41 R42: "RES, 15 ohm, 5%, 0.1W, 0603"
R39 R43: "RES, 15.0k ohm, 0.1%, 0.1W, 0603"
R40 R44: library part CRA2512-FZ-R080ELF, "RES 15 OHM 1W 5% 2512"
R45: "RES, 0.02 ohm, 1%, 1W, 1206"
R46: "RES, 95.3k ohm, 1%, 0.1W, 0603"
R47: "RES, 47.5k ohm, 1%, 0.1W, 0603"
R48: "RES, 10.0k ohm, 1%, 0.1W, 0603"
R49: "RES, 7.50k ohm, 1%, 0.1W, 0603"
R50: "RES, 15.8k ohm, 1%, 0.1W, 0603"
R51: "RES, 56.0k ohm, 0.1%, 0.1W, 0603"
R52 R53 R54 R55: library part Res2, "Resistor"
TP1 TP2: "Test Point, O.040 Hole"
U3: library part PCF8575_PW_24, "Imported"
U4 U6: "Imported"
U7 U9: library part MAX485
U11 U12: library part DAC8760IPWP_1, "1-Channel, 16-Bit, Programmable Current/Voltage Output DAC for 4-20mA Current Loop Applications"
U13: "Positive High Voltage Hot Swap / Inrush Current Controller with Power Limiting, 10-pin MSOP, Pb-Free"
U14: library part SWITCHING
U15: library part AS1117

## Via types
v1: diameter 0.7, hole 0.4, Top Layer to Bottom Layer, 179 vias

## Nets (pads, with @x,y where several pads share a name; then routed paths per layer and width w, separated by ;. In a path a pad name is that pad's centre, name@x,y a point inside that pad or via, vN(x,y) a via of type N, cw(c..) or ccw(c..) an arc to the next point about the centre after c; other vN are vias at no path point)
+15V: C46.2 C48.1 C49.1 C52.2 L1.1 L2.2 R53.1 | length 38.8
  Top Layer w0.5: v1(55.9,55.79) 54.34,57.35 R53.1@54.34,59.99 C46.2@56.8,59.99 ; L1.1@59.94,48.23 L1.1@60.11,48.06
  Top Layer w0.8: L2.2@38.61,46.42 52.965,46.42 C49.1@53.19,46.195 55.455,46.195 C52.2@57.49,48.23 L1.1@59.94,48.23
  Bottom Layer w0.5: v1(55.9,55.79) 56.1,55.59 v1(56.1,46.87)
+15V_ISO: C17.1 C18.1 C19.1 C27.1 C28.1 C29.1 C50.2 C51.2 D20.4 D23.4 L1.2 U11.24 U12.24 | length 100.2
  Top Layer w0.5: L1.2@62.11,48.06 C51.2@64.15,48.06 ; C51.2@64.32,48.23 C50.2@66.69,48.23 ; C50.2@67.39,47.75 69.67,47.75 70.2,48.28 70.2,50 71.06,50.86 C18.1@72.62,50.86 75.665,50.86 C17.1@76.41,51.605 76.651,51.846 79.086,51.846 ; D20.4@78.48,65.08 81.21,65.08 C19.1@81.48,64.81 ; 78.87,51.85 U11.24@80.41,51.85 ; C28.1@99.12,50.95 102.465,50.95 C27.1@102.82,51.305 103.361,51.846 U12.24@107.34,51.846 ; D23.4@106.33,65.08 108.79,65.08 C29.1@109.06,64.81
  Bottom Layer w0.5: v1(79.81,65.09) 75.91,65.09 74.24,63.42 v1(74.24,50.87) 100.22,50.87 v1(100.32,50.97) 100.32,63.47 101.94,65.09 v1(107.56,65.09)
+24VDC_LIMIT: C43.1 C47.1 C53.1 C54.2 C55.2 C57.1 Q1.1 Q1.2 Q1.3 R48.1 U13.9 U14.1 U16.7 | length 76.6
  Top Layer w0.3: R48.1@8.2,65.05 R48.1@8.51,65.05 ; U13.9@12.64,67.3 10.76,67.3 R48.1@8.51,65.05 ; C43.1@15.694,61.07 15.694,63.936 14.58,65.05 R48.1@8.51,65.05
  Top Layer w0.5: U16.7@11.806,44.33 11.806,45.896 12.34,46.43 C54.2@17.384,46.43 ; C53.1@37.837,62.639 C53.1@37.97,62.639 ; U14.1@43.271,62.506 U14.1@43.405,62.639
  Top Layer w0.8: C43.1@15.694,60.83 15.694,56.322 C57.1@16.976,55.04 ; C43.1@15.694,61.07 15.934,61.07 17.304,62.44 Q1.1@20.194,62.44 Q1.2@21.464,62.44 Q1.3@22.734,62.44 ; C54.2@17.384,46.43 17.334,46.48 C55.2@17.334,48.97 17.334,54.682 C57.1@16.976,55.04 ; C53.1@37.837,62.639 37.686,62.79 C47.1@32.21,62.79 28.08,62.79 26.96,61.67 26.96,60.11 25.68,58.83 20.766,58.83 C57.1@16.976,55.04 ; C53.1@37.97,62.506 U14.1@43.271,62.506
\C\S_AO: ISO1.14 U11.7 U12.7 | length 62.8
  Top Layer w0.3: U11.7@84.463,46.284 84.463,36.127 v1(85.85,34.74) ; U12.7@111.383,46.284 111.383,34.967 111.68,34.67 v1(115.99,34.67) 115.99,36.39 116.365,36.765 ISO1.14@118.63,36.765
  Bottom Layer w0.3: v1(85.85,34.74) 85.88,34.71 115.95,34.71 v1(115.99,34.67)
AD_R\D\Y\: P2.7 U5.2 | length 107.7
  Top Layer w0.3: U5.2@47.95,25.66 49.55,25.66 v1(50.22,24.99) ; v1(50.28,28.57) 56.29,28.57 57.31,29.59 v1(57.31,39.58)
  Bottom Layer w0.3: v1(50.22,24.99) 50.22,28.57 v1(50.28,28.57) ; v1(57.31,39.58) 57.97,40.24 57.97,70.2 58.95,71.18 107.72,71.18 108.458,71.918 P2.7@108.458,73.914
AIN0: R33.2 R34.1 U5.4 | length 16.8
  Top Layer w0.3: U5.4@47.95,26.66 51.81,26.66 52.671,25.799 R33.2@52.671,17.64 53.044,17.64 R34.1@55.33,15.354
AIN0_PIN: P6.6 R33.1 | length 9.9
  Top Layer w0.3: P6.6@51.21,6.07 51.21,12.05 52.671,13.511 R33.1@52.671,15.354
AIN1: R35.2 R56.1 U5.5 | length 14.9
  Top Layer w0.3: U5.5@47.95,27.16 46.89,27.16 46.26,26.53 46.26,20.59 47.354,19.496 R35.2@47.354,17.64 47.727,17.64 R56.1@50.013,15.354
AIN1_PIN: P6.5 R35.1 | length 9.8
  Top Layer w0.3: R35.1@47.354,15.354 47.354,14.126 48.67,12.81 P6.5@48.67,6.07
AIN2: R57.2 R58.1 U5.6 | length 17.6
  Top Layer w0.3: U5.6@43.85,27.16 45.27,27.16 45.52,26.91 45.52,21.3 44.91,20.69 42.37,20.69 42.037,20.357 R57.2@42.037,17.64 42.41,17.64 R58.1@44.696,15.354
AIN2_PIN: P6.4 R57.1 | length 12.2
  Top Layer w0.3: R57.1@42.037,15.354 42.037,13.263 42.86,12.44 44.99,12.44 46.13,11.3 P6.4@46.13,6.07
AIN3: R59.2 R60.1 U5.7 | length 18.7
  Top Layer w0.3: R60.1@39.379,15.354 37.093,17.64 R59.2@36.72,17.64 36.72,24.78 38.6,26.66 U5.7@43.85,26.66
AIN3_PIN: P6.3 R59.1 | length 14.8
  Top Layer w0.3: R59.1@36.72,15.354 36.72,11.89 37.92,10.69 42.45,10.69 43.59,9.55 P6.3@43.59,6.07
CANRX: P1.26 U8.4 | length 155.4
  Top Layer w0.3: v1(88.82,6.5) 88.82,4.52 91.87,1.47 179.73,1.47 181.64,3.38 181.64,11.11 184.17,13.64 v1(184.54,13.64) ; v1(196.3,13.64) 196.3,15.59 196.87,16.16 196.87,20.2 197.66,20.99 198.6,20.99 198.966,21.356 U8.4@198.966,22.99
  Bottom Layer w0.3: P1.26@85.598,28.198 84.36,26.96 84.36,22.93 88.79,18.5 88.79,6.53 v1(88.82,6.5) ; v1(184.54,13.64) v1(196.3,13.64)
CANTX: P1.24 U8.1 | length 157
  Top Layer w0.3: v1(90.53,5.6) 90.53,3.89 92.31,2.11 179.35,2.11 180.96,3.72 180.96,11.55 v1@183.95,14.54 ; v1@197.59,14.5 v1(197.7,14.61) 197.7,19.99 198.02,20.31 202.23,20.31 202.776,20.856 U8.1@202.776,22.99
  Bottom Layer w0.3: P1.24@88.138,28.198 86.94,27 86.94,22.63 90.57,19 90.57,5.64 v1(90.53,5.6) v1@90.52,5.59 ; v1(184.03,14.61) v1(197.7,14.61)
COM1: K1.2 K3.2 K5.2 K7.2 K9.2 K11.2 K13.2 K15.2 P4.9 | length 98.8
  Top Layer w1: P4.9@146.81,96.13 151.05,91.89 151.05,83.84 155.08,79.81 182.111,79.81 K15.2@189.429,72.492
  Bottom Layer w1: K15.2@189.429,72.492 K13.2@195.358,72.492 K11.2@201.24,72.492 K9.2@207.219,72.492 K7.2@213.197,72.492 K5.2@219.176,72.492 K3.2@225.155,72.492 K1.2@231.134,72.492
DGND: C1.1 C2.1 C3.1 C4.1 C5.1 C7.2 C8.1 C9.1 C10.2 C11.1 C12.1 C13.2 C30.2 C38.1 C39.1 C40.1 C41.1 C42.1 C43.2 C44.2 C45.2 C47.2 C48.2 C49.2 C52.1 C53.2 C54.1 C55.1 C57.2 C58.2 C60.2 C61.2 CA1.2 CA2.2 D27.1 D28.1 D29.1 ISO1.2 ISO1.8 J1.3 J1.6 L3.1 P1.1 P1.2 P1.43 P1.44 P1.45 P1.46 P2.1 P2.2 P4.10 P4.32 R20.2 R23.2 R26.1 R30.2 R49.1 R50.1 R51.1 R52.2 R55.2 TP2.1 U1.1 U2.1 U3.2 U3.3 U3.12 U3.21 U4.9 U6.9 U7.5 U8.2 U9.5 U13.5 U14.3 U14.5 U15.1 U16.6 | length 215.5
  Top Layer w0.3: R51.1@5.91,68.3 5.964,68.354 C45.2@5.964,70.83 ; R50.1@12.09,75.906 R49.1@14.69,75.906 ; U13.5@16.74,68.8 v1(16.74,69.93) ; P2.1@116.078,73.914 P2.2@116.078,76.454 ; ISO1.2@127.73,35.495 129.665,35.495 130.676,36.506 C30.2@132.04,36.506 ; C1.1@138.57,37.27 138.57,32.17 139.78,30.96 U1.1@141.58,30.96 ; C3.1@161.45,37.27 161.45,32.29 162.78,30.96 U2.1@164.24,30.96
  Top Layer w0.5: R55.2@6.04,45.844 6.646,46.45 10.13,46.45 10.536,46.044 U16.6@10.536,44.33 ; C54.1@19.62,46.48 C55.1@19.62,48.97 C55.1@20.024,49.374 ; C57.2@20.024,55.04 C55.1@20.024,49.374 ; D28.1@30.36,49.64 20.29,49.64 C55.1@20.024,49.374 ; C38.1@31.97,80.05 C39.1@34.465,80.05 C40.1@36.96,80.05 C41.1@39.455,80.05 C42.1@41.95,80.05 ; C47.2@32.21,59.742 32.688,60.22 C53.2@37.97,60.22 ; C48.2@47.63,52.245 C49.2@53.19,52.245 55.575,52.245 57.39,50.43 C52.1@57.49,50.43 ; v1(50.205,59.885) U14.5@50.205,62.639 ; R52.2@59.57,59.99 60.07,59.49 L3.1@60.07,50.43
  Top Layer w0.8: R55.2@6.04,45.844 v1(6.04,42.58) 4.59,41.13 4.59,35.34 6.11,33.82 D29.1@7.7,33.82 ; C58.2@25.02,38.395 30.535,38.395 CA2.2@31.245,39.105 ; D28.1@30.36,49.64 31.245,48.755 CA2.2@31.245,39.105 ; U14.3@46.805,62.639 46.805,53.07 C48.2@47.63,52.245 ; C60.2@54.72,38.466 54.301,38.885 CA1.2@51.095,38.885 51.095,39.355 49.07,41.38 42.23,41.38 40.449,39.599 U15.1@39.086,39.599 38.784,39.296 C61.2@34.85,39.296 34.659,39.105 CA2.2@31.245,39.105 ; C52.1@57.49,50.33 59.97,50.33 L3.1@60.07,50.43 ; P1.1@116.078,25.658 P1.2@116.078,28.198
  Top Layer w1: C42.1@41.95,80.05 51.47,80.05 54.445,83.025 D27.1@54.445,86.52 61.6,86.52 P4.32@62.99,85.13
  Bottom Layer w0.3: C5.1@189.61,47.77 189.61,46.76 189.945,46.425 U3.21@193.191,46.425 196.615,46.425 197.265,47.075 U3.3@198.829,47.075 U3.2@198.829,47.725 ; v1(198.829,40.379) U3.12@198.829,41.225
  Bottom Layer w0.8: P1.46@60.198,28.198 P1.45@60.198,25.658 P1.43@62.738,25.658 P1.44@62.738,28.198
  other v1: 231.69,3.29 217.19,7.57 233.17,8.07 176.65,10.37 176.32,12.68 17.64,21.58 22.42,21.91 162.81,26.04 121.28,28.37 123.37,28.44 139.13,29.56 162.01,29.6 207.47,30.64 204.5,31.47 139.25,32.92 162.25,33.23 151.23,33.88 151.46,35.82 45.79,41.41 178.26,44.83 179.9,45.21 201.74,48.7 196.11,50.13 190.49,52.35 130.21,52.75 46.84,57.26 183,59.83 241.74,64.59 241.74,67.39 186.21,68.54 177.48,68.71 13.35,75.91 186.71,98.86 97.23,99.19 82.23,99.52
ENABLE1: P1.16 U7.2 U7.3 | length 184.8
  Top Layer w0.3: v1@235.6,26.06 235.594,26.066 U7.2@235.594,30.41 U7.3@236.864,30.41
  Bottom Layer w0.3: P1.16@98.298,28.198 99.59,26.906 99.59,23.3 104.45,18.44 104.45,4.9 106.624,2.726 222.542,2.726 225.656,5.839 225.656,25.375 226.545,26.264 235.396,26.264 v1@235.6,26.06
  other v1: 235.6,26.12
ENABLE2: P1.23 U9.2 U9.3 | length 191.2
  Top Layer w0.3: U9.2@221.074,30.41 U9.3@222.344,30.41 222.344,25.566 222.75,25.16 v1@226.84,25.16
  Bottom Layer w0.3: P1.23@88.138,25.658 88.138,22.582 91.36,19.36 91.36,3.18 92.453,2.087 222.807,2.087 226.294,5.575 226.294,24.614 v1@226.84,25.16
  other v1: 226.82,25.2
GND_SIG: C17.2 C18.2 C19.2 C20.2 C21.2 C23.2 C24.2 C25.2 C26.2 C27.2 C28.2 C29.2 C31.2 C32.2 C34.2 C35.2 C36.2 C37.2 C50.1 C51.1 D20.1 D21.2 D22.2 D23.1 D24.2 D25.2 ISO1.9 ISO1.15 L3.2 P4.27 P4.28 P6.1 P6.2 R34.2 R39.1 R43.1 R56.2 R58.2 R60.2 U5.1 U5.3 U11.1 U11.4 U11.5 U11.6 U11.11 U11.12 U11.23 U11.25 U12.1 U12.4 U12.5 U12.6 U12.11 U12.12 U12.23 U12.25 | length 256.3
  Top Layer w0.3: P6.1@38.51,6.07 P6.2@41.05,6.07 ; R60.2@39.379,17.64 39.41,17.671 v1(39.41,19.3) ; R58.2@44.696,17.64 44.72,17.664 v1(44.72,19.41) ; U5.1@47.95,25.16 47.95,24.38 48.01,24.32 ; U5.3@47.95,26.16 50.84,26.16 v1(51.19,25.81) ; v1(50,19.37) 50,17.653 R56.2@50.013,17.64 ; v1(55.3,19.5) 55.33,19.47 R34.2@55.33,17.64 ; L3.2@62.07,50.43 64.22,50.43 C51.1@64.32,50.33 C50.1@67.19,50.33 ; D21.2@67.43,62.57 69.894,62.57 C23.2@69.94,62.524 ; C18.2@72.62,48.574 72.62,47.295 73.06,46.855 C17.2@76.41,46.855 76.981,46.284 U11.1@80.561,46.284 80.561,48.131 81.06,48.63 U11.25@83.703,48.63 ; D20.1@76.58,64.88 76.58,66.27 77.06,66.75 83.8,66.75 84.64,65.91 84.64,62.524 ; C25.2@79.82,59.086 v1(79.82,60.46) ; U11.23@81.214,51.846 81.214,49.916 81.6,49.53 83.663,49.53 U11.25@84.133,49.06 ; C19.2@81.48,62.524 84.64,62.524 ; C20.2@82.156,38.42 82.206,38.47 C21.2@82.206,40.9 82.512,41.206 U11.4@82.512,46.284 U11.5@83.162,46.284 ; U11.6@83.812,46.284 U11.5@83.162,46.284 ; U11.11@87.064,46.284 U11.12@87.714,46.284 87.714,48.616 ; D22.2@89.45,62.57 87.176,62.57 C26.2@87.13,62.524 84.64,62.524 ; R39.1@91.22,48.59 91.194,48.616 87.714,48.616 ; R39.1@91.264,48.634 C24.2@94.07,48.634 C28.2@98.83,48.634 ; D24.2@95.65,62.57 97.964,62.57 C34.2@98.01,62.524 ; C28.2@98.83,48.664 C28.2@98.83,48.634 ; D23.1@104.43,64.88 104.43,66.24 104.71,66.52 111.52,66.52 112.01,66.03 v1@112.01,62.524 ; U12.23@108.134,51.846 108.134,50.026 108.45,49.71 110.403,49.71 U12.25@111.053,49.06 U12.25@110.503,48.51 ; C36.2@108.48,59.136 v1(108.48,60.36) ; C32.2@108.726,38.63 C31.2@108.726,41.15 ; C31.2@108.812,41.196 C31.2@108.766,41.15 108.766,42.986 110.082,44.302 U12.5@110.082,46.284 ; C29.2@109.06,62.524 v1@112.01,62.524 ; U12.4@109.432,46.284 U12.5@110.082,46.284 ; U12.6@110.732,46.284 U12.5@110.082,46.284 ; U12.11@113.984,46.284 U12.12@114.634,46.284 117.884,46.284 118.56,46.96 R43.1@118.56,48.481 121.367,48.481 C35.2@121.46,48.574 ; v1(116.12,33.37) 116.23,33.37 116.99,34.13 116.99,35.22 117.265,35.495 ISO1.15@118.63,35.495 v1(120.475,35.495) ; D25.2@117.18,62.786 114.782,62.786 C37.2@114.52,62.524 v1@112.01,62.524 ; U11.5@83.162,46.284 83.162,48.09 U11.25@83.703,48.63 ; U11.25@83.703,48.63 U11.25@84.133,49.06 ; U11.25@84.133,49.06 87.27,49.06 87.714,48.616 ; C28.2@98.83,48.634 98.83,46.97 99.245,46.555 C27.2@102.82,46.555 103.091,46.284 U12.1@107.481,46.284 107.481,48.071 107.92,48.51 U12.25@110.503,48.51 ; U12.5@110.082,46.284 110.082,48.09 U12.25@110.503,48.51
  Top Layer w0.5: P4.27@78.23,96.13 P4.28@78.23,85.13 78.23,82.21 75.5,79.48 59,79.48 58.23,78.71 58.23,70.05 58.82,69.46 79.52,69.46
  Bottom Layer w0.3: v1(39.41,19.3) 44.52,19.3 v1@44.675,19.455 ; v1(44.72,19.41) 49.91,19.41 51.19,20.69 v1(51.19,25.81) ; v1(50,19.37) 55.17,19.37 v1(55.3,19.5)
  other v1: 55,7.11 38.35,22.04 49.28,22.48 55.6,27 62.75,35.7 68.98,36.71 72.47,36.84 70.75,42.87 68.47,43.06 95.66,45.8 67.9,55.01 93.94,56.66 112.01,62.51 103.6,69.43 75.04,70.28 84.01,70.28
GPIO_20: P1.41 U1.29 U2.29 | length 126.1
  Top Layer w0.254: P1.41@65.278,25.658 65.278,23.422 66.7,22 117.688,22 120.258,24.57 125.648,24.57 131.588,30.51 133.25,30.51 134.5,31.76 134.5,41.85 v1(134.17,42.18) ; v1(140.1,42.47) 140.4,42.77 142.749,42.77 143.15,42.77 143.53,42.39 U1.29@143.53,40.76 ; v1(163.31,42.58) 163.49,42.76 165.87,42.76 166.19,42.44 U2.29@166.19,40.76
  Bottom Layer w0.254: v1(134.17,42.18) 134.46,42.47 v1(140.1,42.47) 140.21,42.58 v1(163.31,42.58)
I2C2_SCL: P1.19 R31.2 U3.22 U5.10 | length 228
  Top Layer w0.3: v1(40.59,24.27) 43.57,24.27 43.85,24.55 U5.10@43.85,25.16 ; v1(98.79,8) 98.79,4.69 100.04,3.44 178.47,3.44 179.54,4.51 179.54,13.31 182.73,16.5 186.23,16.5 186.54,16.81 R31.2@186.54,19.104 187.144,19.104 188.02,19.98 188.02,22.72 190.03,24.73 190.03,45.28 191.37,46.62 v1(191.37,47.24)
  Bottom Layer w0.3: v1(40.59,24.27) 40.59,30.12 41.195,30.725 93.905,30.725 94.51,30.12 94.51,26.95 P1.19@93.218,25.658 93.218,22.542 94.08,21.68 97.27,21.68 98.78,20.17 v1@98.78,8 ; v1(191.37,47.24) 191.535,47.075 U3.22@193.191,47.075
I2C2_SDA: P1.20 R32.2 U3.23 U5.9 | length 230
  Top Layer w0.3: v1(41.72,25.23) 42.15,25.66 U5.9@43.85,25.66 ; v1(97.93,8.89) 97.93,4.46 99.58,2.81 178.92,2.81 180.29,4.18 180.29,12.48 183.41,15.6 188.83,15.6 189.45,16.22 R32.2@189.45,19.104 190.94,20.594 190.94,44.95 191.48,45.49 195.12,45.49 195.61,45.98 v1(195.61,47.72)
  Bottom Layer w0.3: v1(41.72,25.23) 41.72,29.59 42.12,29.99 92.88,29.99 93.218,29.652 P1.20@93.218,28.198 91.92,26.9 91.92,22.3 93.3,20.92 96.86,20.92 97.93,19.85 v1(97.93,8.89) ; U3.23@193.191,47.725 195.605,47.725 v1(195.61,47.72)
IN_PIN0: P3.1 U1.5 | length 100.4
  Top Layer w0.254: v1(65.99,15.21) 66.47,14.73 118.31,14.73 119.672,16.092 119.672,19.149 121.882,21.36 127.182,21.36 132.912,27.09 143.53,27.09 144.18,27.74 U1.5@144.18,30.96
  Bottom Layer w0.254: P3.1@62.99,5.97 64.99,5.97 65.99,6.97 v1(65.99,15.21)
IN_PIN1: P3.2 U1.6 | length 95.2
  Top Layer w0.254: P3.2@62.99,16.97 62.99,14.74 63.65,14.08 118.579,14.08 120.322,15.822 120.322,18.88 122.152,20.71 127.452,20.71 133.182,26.44 143.799,26.44 144.83,27.471 U1.6@144.83,30.96
IN_PIN2: P3.3 U1.7 | length 93.2
  Top Layer w0.254: P3.3@70.61,5.97 70.61,12.74 71.3,13.43 118.848,13.43 120.972,15.553 120.972,18.611 122.421,20.06 127.721,20.06 133.451,25.79 144.068,25.79 145.48,27.202 U1.7@145.48,30.96
IN_PIN3: P3.4 U1.8 | length 91.4
  Top Layer w0.254: v1(72.27,12.13) 72.842,12.702 119.15,12.702 121.7,15.252 121.7,18.42 122.69,19.41 127.99,19.41 133.72,25.14 144.338,25.14 146.13,26.932 U1.8@146.13,30.96
  Bottom Layer w0.254: P3.4@70.61,16.97 72.27,15.31 v1(72.27,12.13)
IN_PIN4: P3.5 U1.25 | length 106.8
  Top Layer w0.254: v1(75.67,17.24) 75.67,18.94 78.08,21.35 118.092,21.35 120.662,23.92 125.912,23.92 131.892,29.9 133.562,29.9 135.16,31.498 135.16,42.508 138.162,45.51 144.228,45.51 146.13,43.608 U1.25@146.13,40.76
  Bottom Layer w0.254: v1(75.67,17.24) 75.67,6.53 76.23,5.97 P3.5@78.23,5.97
IN_PIN5: P3.6 U1.26 | length 88.5
  Top Layer w0.254: P3.6@78.23,16.97 81.96,20.7 118.362,20.7 120.932,23.27 126.182,23.27 132.162,29.25 133.832,29.25 135.81,31.228 135.81,42.238 138.432,44.86 143.958,44.86 145.48,43.338 U1.26@145.48,40.76
IN_PIN6: P3.7 U1.27 | length 96
  Top Layer w0.254: v1(83.64,19.14) 84.55,20.05 118.631,20.05 121.201,22.62 126.451,22.62 132.431,28.6 134.101,28.6 136.46,30.959 136.46,41.969 138.701,44.21 143.689,44.21 144.83,43.069 U1.27@144.83,40.76
  Bottom Layer w0.254: v1(83.64,19.14) 83.64,6.33 84,5.97 P3.7@85.85,5.97
IN_PIN7: P3.8 U1.28 | length 79.2
  Top Layer w0.254: P3.8@85.85,16.97 85.85,18.74 86.51,19.4 118.9,19.4 121.47,21.97 126.72,21.97 132.7,27.95 134.37,27.95 137.11,30.69 137.11,41.7 138.97,43.56 143.42,43.56 144.18,42.8 U1.28@144.18,40.76
IN_PIN8: P3.9 U1.9 | length 71.4
  Top Layer w0.254: P3.9@93.47,5.97 93.47,10.48 94.99,12 126.11,12 128.1,13.99 128.1,18.308 134.252,24.46 144.635,24.46 146.78,26.605 U1.9@146.78,30.96
IN_PIN9: P3.10 U1.10 | length 73
  Top Layer w0.254: v1(95.67,10.88) 96.14,11.35 126.379,11.35 128.75,13.721 128.75,18.039 134.521,23.81 144.904,23.81 147.43,26.336 U1.10@147.43,30.96
  Bottom Layer w0.254: P3.10@93.47,16.97 93.47,11.87 94.46,10.88 v1(95.67,10.88)
IN_PIN10: P3.11 U1.11 | length 64.7
  Top Layer w0.254: P3.11@101.09,5.97 101.09,9.37 102.42,10.7 126.648,10.7 129.4,13.452 129.4,17.77 134.79,23.16 145.173,23.16 148.08,26.067 U1.11@148.08,30.96
IN_PIN11: P3.12 U1.12 | length 70
  Top Layer w0.254: v1@102.93,10.032 132.102,10.032 134.41,12.34 134.41,18.948 137.972,22.51 145.442,22.51 148.73,25.798 U1.12@148.73,30.96
  Bottom Layer w0.254: P3.12@101.09,16.97 101.09,10.37 101.65,9.81 v1@102.93,9.81
  other v1: 102.93,9.8
IN_PIN12: P3.13 U1.13 | length 58.1
  Top Layer w0.254: P3.13@108.71,5.97 112.122,9.382 132.371,9.382 135.06,12.071 135.06,18.678 138.242,21.86 145.712,21.86 149.38,25.528 U1.13@149.38,30.96
IN_PIN13: P3.14 U1.14 | length 65.6
  Top Layer w0.254: v1(112.83,8.49) 116.148,8.49 116.39,8.732 132.64,8.732 135.71,11.802 135.71,18.409 138.511,21.21 145.981,21.21 150.03,25.259 U1.14@150.03,30.96
  Bottom Layer w0.254: P3.14@108.71,16.97 108.71,9.64 109.86,8.49 v1(112.83,8.49)
IN_PIN14: P3.15 U1.15 | length 52.1
  Top Layer w0.254: P3.15@116.33,5.97 118.442,8.082 132.909,8.082 136.36,11.532 136.36,18.14 138.78,20.56 146.25,20.56 150.68,24.99 U1.15@150.68,30.96
IN_PIN15: P3.16 U1.24 | length 56.9
  Top Layer w0.254: v1(116.61,23.68) 117.17,23.68 119.71,26.22 124.73,26.22 129.88,31.37 132.85,31.37 133.71,32.23 133.71,41.18 133.2,41.69 133.2,42.58 133.85,43.23 134.83,43.23 137.87,46.27 144.53,46.27 146.78,44.02 U1.24@146.78,40.76
  Bottom Layer w0.254: P3.16@116.33,16.97 116.33,23.4
IN_PIN16: P3.17 U2.5 | length 67.1
  Top Layer w0.254: v1(155,22.61) 157.612,22.61 159.142,24.14 165.442,24.14 166.84,25.538 U2.5@166.84,30.96
  Bottom Layer w0.254: P3.17@123.95,5.97 121.23,8.69 121.23,17.72 124.84,21.33 153.72,21.33 v1(155,22.61)
IN_PIN17: P3.18 U2.6 | length 52.7
  Top Layer w0.254: v1@155.9,21.87 157.792,21.87 159.412,23.49 165.712,23.49 167.49,25.268 U2.6@167.49,30.96
  Bottom Layer w0.254: P3.18@123.95,16.97 126.39,16.97 129.99,20.57 154.6,20.57 v1@155.9,21.87
  other v1: 155.69,21.84
IN_PIN18: P3.19 U2.7 | length 60.7
  Top Layer w0.254: v1(156.48,21.15) 157.991,21.15 159.681,22.84 165.981,22.84 168.14,24.999 U2.7@168.14,30.96
  Bottom Layer w0.254: P3.19@131.57,5.97 129.33,8.21 129.33,18.07 131.07,19.81 155.14,19.81 v1(156.48,21.15)
IN_PIN19: P3.20 U2.8 | length 47.5
  Top Layer w0.254: v1@157.23,20.47 158.42,20.47 160.14,22.19 166.25,22.19 168.79,24.73 U2.8@168.79,30.96
  Bottom Layer w0.254: P3.20@131.57,16.97 131.57,18.47 132.31,19.21 155.97,19.21 v1@157.23,20.47
  other v1: 157.23,20.46
IN_PIN20: P3.21 U2.25 | length 68.7
  Top Layer w0.254: P3.21@139.19,5.97 137.18,7.98 137.18,17.91 138.43,19.16 143.4,19.16 144.24,20 148.222,20 154.462,26.24 156.992,26.24 157.99,27.238 157.99,42.958 160.367,45.335 167.443,45.335 168.79,43.988 U2.25@168.79,40.76
IN_PIN21: P3.22 U2.26 | length 53.1
  Top Layer w0.254: P3.22@139.19,16.97 142.47,16.97 144.92,19.42 148.562,19.42 154.732,25.59 157.262,25.59 158.64,26.968 158.64,42.688 160.712,44.76 167.098,44.76 168.14,43.718 U2.26@168.14,40.76
IN_PIN22: P3.23 U2.27 | length 58.7
  Top Layer w0.254: P3.23@146.81,5.97 144.57,8.21 144.57,17.76 145.652,18.842 148.903,18.842 155.001,24.94 157.531,24.94 159.29,26.699 159.29,42.419 160.981,44.11 166.829,44.11 167.49,43.449 U2.27@167.49,40.76
IN_PIN23: P3.24 U2.28 | length 43.4
  Top Layer w0.254: P3.24@146.81,16.97 146.49,17.29 148.27,17.29 155.27,24.29 157.8,24.29 159.94,26.43 159.94,42.15 161.25,43.46 166.56,43.46 166.84,43.18 U2.28@166.84,40.76
IN_PIN24: P3.25 U2.9 | length 40.1
  Top Layer w0.254: P3.25@154.43,5.97 154.43,13.46 152.38,15.51 152.38,18.26 153.404,19.284 158.356,19.284 160.642,21.57 168.01,21.57 169.44,23 U2.9@169.44,30.96
IN_PIN25: P3.26 U2.10 | length 26.3
  Top Layer w0.254: P3.26@154.43,16.97 156.961,16.97 160.911,20.92 168.279,20.92 170.09,22.731 U2.10@170.09,30.96
IN_PIN26: P3.27 U2.11 | length 35.2
  Top Layer w0.254: P3.27@162.05,5.97 159.25,8.77 159.25,18.34 161.18,20.27 168.548,20.27 170.74,22.462 U2.11@170.74,30.96
IN_PIN27: P3.28 U2.12 | length 20.5
  Top Layer w0.254: P3.28@162.05,16.97 164.72,19.64 169.22,19.64 171.39,21.81 U2.12@171.39,30.96
IN_PIN28: P3.29 U2.13 | length 29.4
  Top Layer w0.254: P3.29@169.67,5.97 167.2,8.44 167.2,18.47 167.76,19.03 170.05,19.03 172.04,21.02 U2.13@172.04,30.96
IN_PIN29: P3.30 U2.14 | length 15.2
  Top Layer w0.254: P3.30@169.67,16.97 172.69,19.99 U2.14@172.69,30.96
IN_PIN30: P3.31 U2.15 | length 26.6
  Top Layer w0.254: U2.15@173.34,30.96 173.34,9.92 P3.31@177.29,5.97
IN_PIN31: P3.32 U2.24 | length 68.6
  Top Layer w0.254: v1(151.76,25.09) 153.65,26.98 156.66,26.98 157.37,27.69 157.37,43.32 159.98,45.93 167.93,45.93 169.44,44.42 U2.24@169.44,40.76
  Bottom Layer w0.254: v1(151.76,25.09) 160.25,25.09 166.01,19.33 174.93,19.33 P3.32@177.29,16.97
MISO_AO: ISO1.11 U12.10 | length 10.6
  Top Layer w0.3: U12.10@113.333,46.284 113.333,41.22 113.978,40.575 ISO1.11@118.63,40.575
MOSI_AO: ISO1.12 U11.9 | length 44.3
  Top Layer w0.3: U11.9@85.763,46.284 85.763,37.787 v1(87.05,36.5) ; v1(114.19,36.55) 114.19,38.86 114.635,39.305 ISO1.12@118.63,39.305
  Bottom Layer w0.3: v1@87.115,36.43 v1@114.19,36.43
NetC22_1: C22.1 R37.1 U11.21 | length 21.2
  Top Layer w0.3: U11.21@82.515,51.846 82.515,54.01 81.945,54.58 77.54,54.58 76.91,55.21 R37.1@76.91,56.99 77.79,56.99 78.3,57.5 78.3,60.64 78.93,61.27 81.99,61.27 82.62,60.64 C22.1@82.62,59.1
NetC22_2: C22.2 U11.17 | length 7.1
  Top Layer w0.3: C22.2@82.62,56.814 84.566,56.814 85.116,56.264 U11.17@85.116,51.846
NetC24_1: C24.1 U11.14 U11.15 | length 11.7
  Top Layer w0.3: U11.15@86.416,51.846 U11.14@87.066,51.846 87.066,53.306 87.47,53.71 93.51,53.71 94.07,53.15 C24.1@94.07,50.92